# Altium PCB cpu2560-double.PcbDoc
Units mm, origin at the board's own origin, x right, y up, seen from the top; angles counter-clockwise.
Board outline 36 x 36 mm, 2 copper layers (Top Layer, Bottom Layer), stack 1.571 mm thick; 5 components, 96 nets, 204 pads, 0 vias.
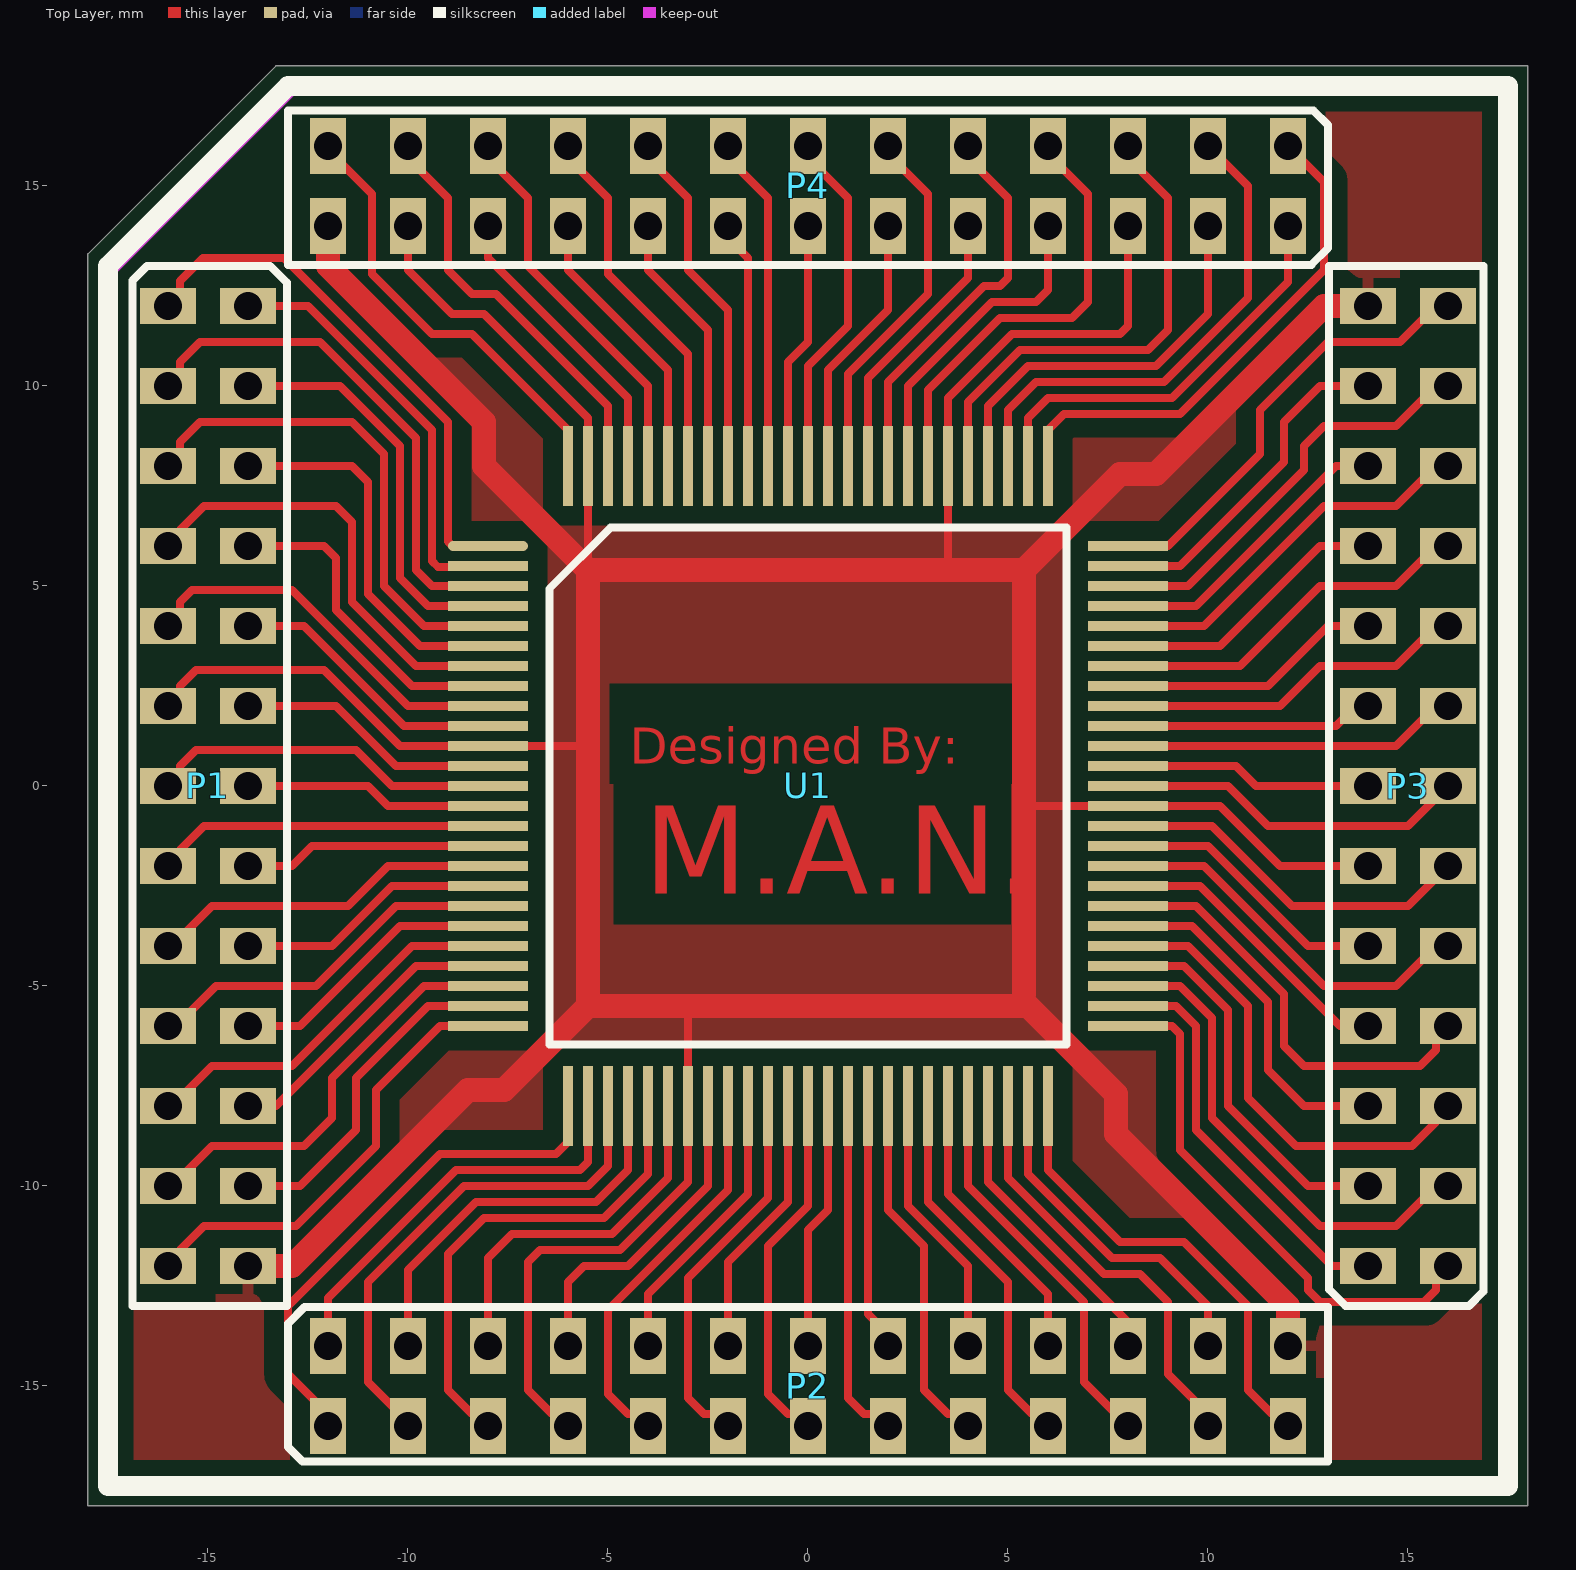
[diagram p0: Top Layer view]
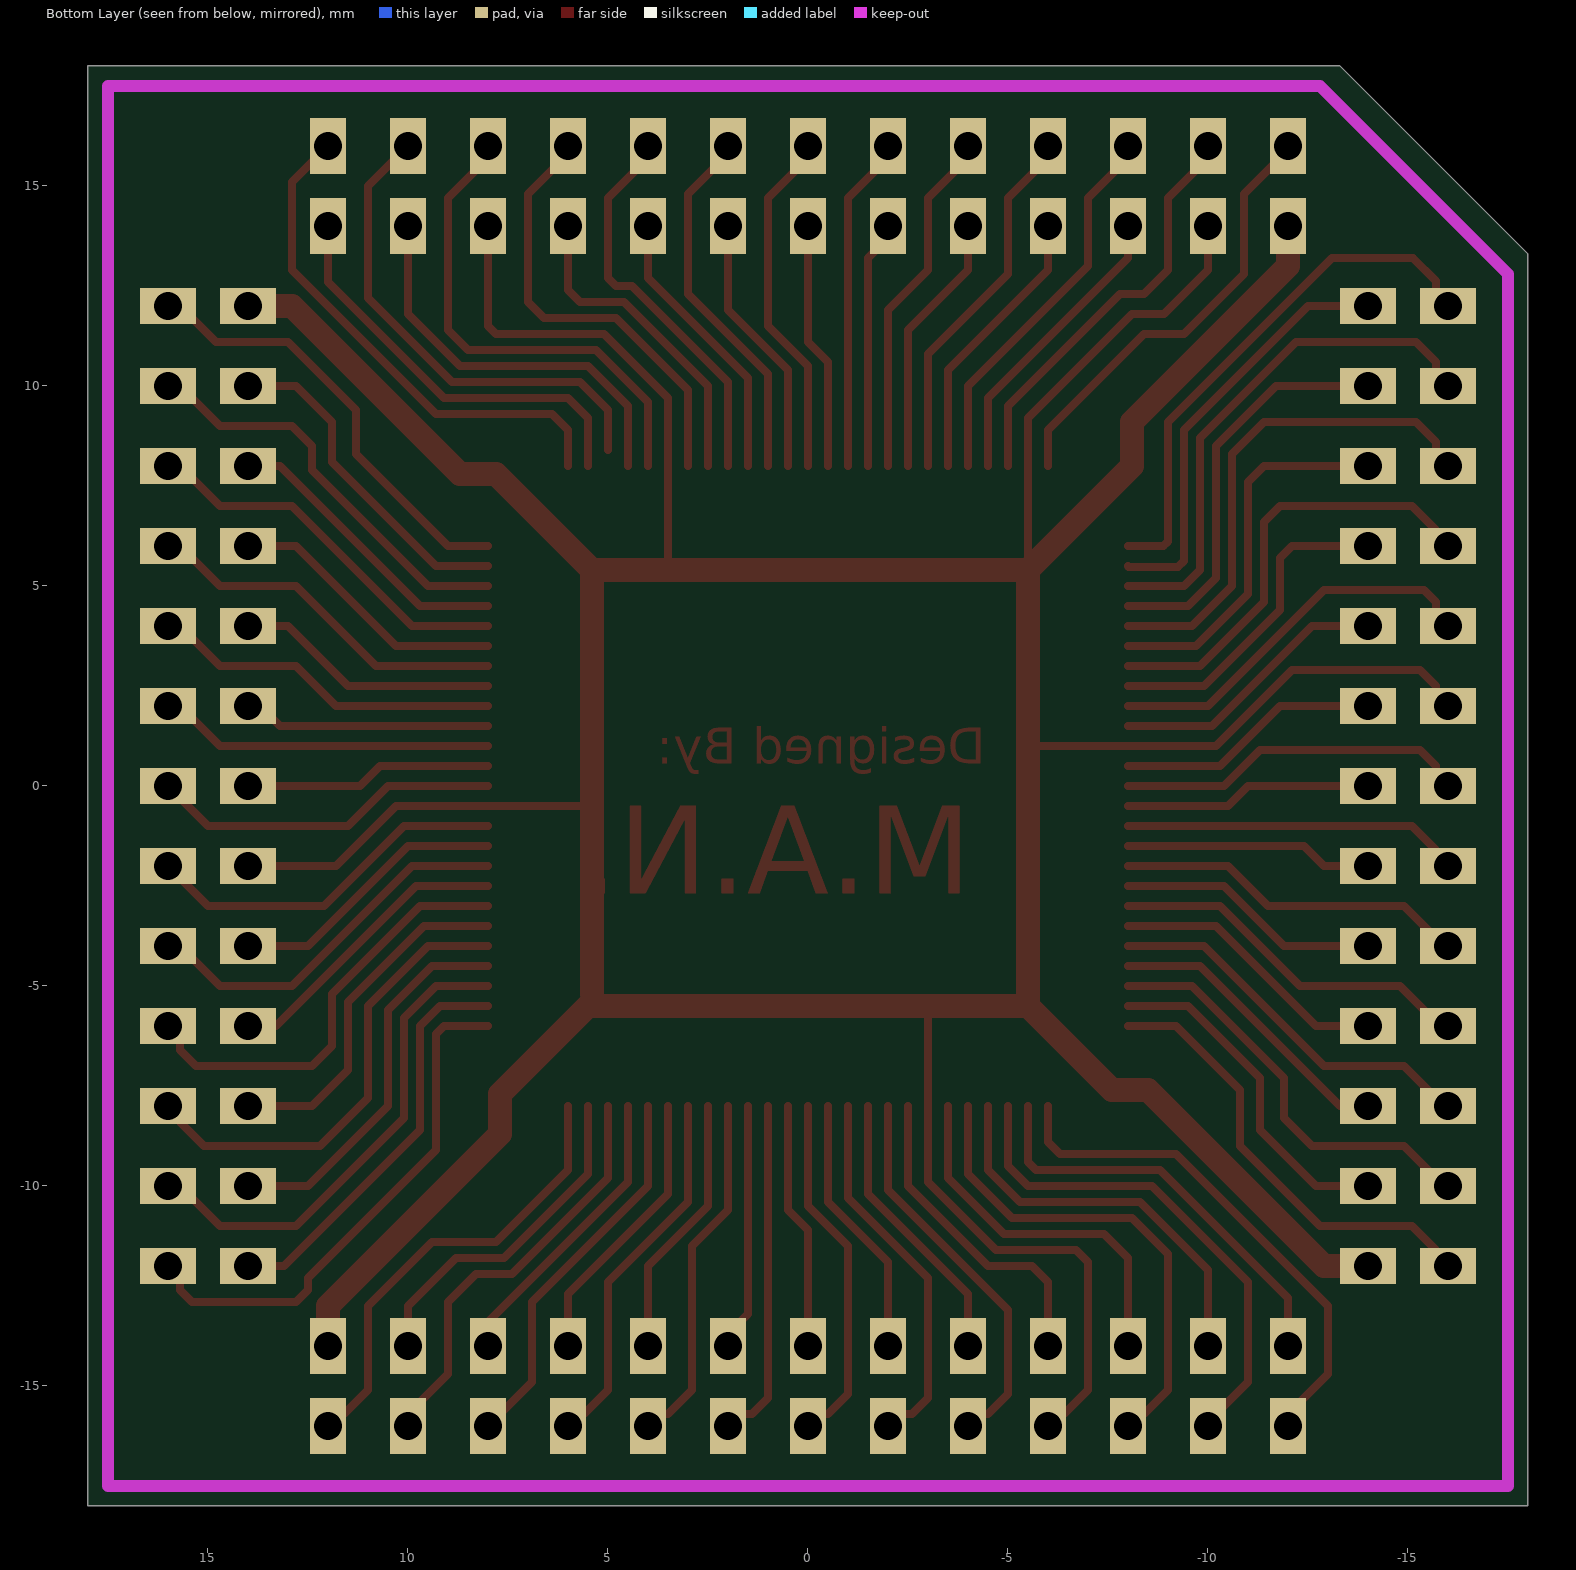
[diagram p1: Bottom Layer view, seen from below]

## Layer stack, top to bottom
Top Solder: solder mask 0.0102, Solder Resist, Dk 3.5
Top Layer: signal copper 0.0356
Dielectric2: dielectric 1.5, FR-4, Dk 4.8
Bottom Layer: signal copper 0.0356
Bottom Solder: solder mask 0.0102, Solder Resist, Dk 3.5

## Board outline
-18,-18 18,-18 18,18 -13.3,18 -18,13.3

## Design rules (kind name [scope] priority, off if disabled: settings)
Clearance Clearance_1 [InNamedPolygon('Top Layer-No Net')] p1: gap=0.5 ignorepadtopadclearanceinfootprint=FALSE except(0: Arc-Hole Track-Hole SMDPad-Hole THPad-Hole Via-Hole Fill-Hole Poly-Hole Region-Hole Text-Hole)
Clearance [All] p2: gap=0.2 ignorepadtopadclearanceinfootprint=FALSE
ComponentClearance [All] p1 off: gap=0.254 collisioncheckmode=3 verticalgap=0.254 showdistances=FALSE
FabricationTestPointUsage TestPointUsage [All] p1: valid=0 allowmultiple=FALSE
FabricationTestpoint Testpoint [All] p1: side=3 testpointundercomponent=TRUE minsize=1.016 maxsize=2.54 preferedsize=1.524 minholesize=0 maxholesize=1.016 preferedholesize=0.813 testpointgrid=0.025 allowsidetop=TRUE allowsidebottom=TRUE usegrid=TRUE gridtolerance=0
Height [All] p1 off: minheight=0 maxheight=25.4 prefheight=12.7
PolygonConnect [All] p1: connectstyle=Relief reliefconductorwidth=0.254 reliefentries=4 polygonreliefangle="90 Angle" airgapwidth=0.254
RoutingLayers [All] p1: top layer_v5=TRUE bottom layer_v5=FALSE
RoutingVias [All] p1: holewidth=0.6 width=1 viastyle="Through Hole" minholewidth=0.711 minwidth=1.27 maxholewidth=0.711 maxwidth=1.27
SolderMaskExpansion [All] p1: expansion=0.102 istentingtop=FALSE
Width [All] p1: maxlimit=1 minlimit=0.2 preferedwidth=0.2
25 further rules are at their usual default settings.

## Components (designator, comment, footprint, x,y, rotation, side; value= is the part's Value field where it differs from the comment)
P1 "MHDR2X13" HED-2mm-13X2 -16,12 r0 top
P2 "MHDR2X13" HED-2mm-13X2 -12,-16 r90 top
P3 "MHDR2X13" HED-2mm-13X2 16,-12 r180 top
P4 "MHDR2X13" HED-2mm-13X2 12,16 r270 top
U1 "ATMEGA 2560 - 100PIN - TQFP" Quad100 0,0 r0 top locked

## Footprints (in the part's own frame and the unit in brackets; to place one, negate y for a bottom-side part, rotate by r counter-clockwise, add the part's x,y. Pads: shape width x height; smd on the part's side, far side on the other; paste and mask are expansions set on the pad)
HED-2mm-13X2 [mm]
  rect 1.4x0.9 hole 0.7: 1(0,0) 2(2,0) 3(0,-2) 4(2,-2) 5(0,-4) 6(2,-4) 7(0,-6) 8(2,-6) 9(0,-8) 10(2,-8) 11(0,-10) 12(2,-10) 13(0,-12) 14(2,-12) 15(0,-14) 16(2,-14) 17(0,-16) 18(2,-16) 19(0,-18) 20(2,-18) 21(0,-20) 22(2,-20) 23(0,-22) 24(2,-22) 25(0,-24) 26(2,-24)
  silkscreen extent -0.89,-25 2.97,1
Quad100 [mm]
  oval 2x0.25 smd: 1(-8,5.999)
  rect 2x0.25 smd: 2(-8,5.499) 3(-8,4.999) 4(-8,4.499) 5(-8,3.999) 6(-8,3.499) 7(-8,2.999) 8(-8,2.499) 9(-8,1.999) 10(-8,1.499) 11(-8,0.999) 12(-8,0.499) 13(-8,-0.001) 14(-8,-0.501) 15(-8,-1.001) 16(-8,-1.501) 17(-8,-2.001) 18(-8,-2.501) 19(-8,-3.001) 20(-8,-3.501) 21(-8,-4.001) 22(-8,-4.501) 23(-8,-5.001) 24(-8,-5.501) 25(-8,-6.001) 51(8,-6.001) 52(8,-5.501) 53(8,-5.001) 54(8,-4.501) 55(8,-4.001) 56(8,-3.501) 57(8,-3.001) 58(8,-2.501) 59(8,-2.001) 60(8,-1.501) 61(8,-1.001) 62(8,-0.501) 63(8,-0.001) 64(8,0.499) 65(8,0.999) 66(8,1.499) 67(8,1.999) 68(8,2.499) 69(8,2.999) 70(8,3.499) 71(8,3.999) 72(8,4.499) 73(8,4.999) 74(8,5.499) 75(8,5.999)
  rect 0.25x2 smd: 26(-6,-8.001) 27(-5.5,-8.001) 28(-5,-8.001) 29(-4.5,-8.001) 30(-4,-8.001) 31(-3.5,-8.001) 32(-3,-8.001) 33(-2.5,-8.001) 34(-2,-8.001) 35(-1.5,-8.001) 36(-1,-8.001) 37(-0.5,-8.001) 38(0,-8.001) 39(0.5,-8.001) 40(1,-8.001) 41(1.5,-8.001) 42(2,-8.001) 43(2.5,-8.001) 44(3,-8.001) 45(3.5,-8.001) 46(4,-8.001) 47(4.5,-8.001) 48(5,-8.001) 49(5.5,-8.001) 50(6,-8.001) 76(6,7.999) 77(5.5,7.999) 78(5,7.999) 79(4.5,7.999) 80(4,7.999) 81(3.5,7.999) 82(3,7.999) 83(2.5,7.999) 84(2,7.999) 85(1.5,7.999) 86(1,7.999) 87(0.5,7.999) 88(0,7.999) 89(-0.5,7.999) 90(-1,7.999) 91(-1.5,7.999) 92(-2,7.999) 93(-2.5,7.999) 94(-3,7.999) 95(-3.5,7.999) 96(-4,7.999) 97(-4.5,7.999) 98(-5,7.999) 99(-5.5,7.999) 100(-6,7.999)
  silkscreen extent -6.46,-6.47 6.46,6.46

## Part data
P1 P2 P3 P4: "Header, 13-Pin, Dual row", LatestRevisionDate=17-Jul-2002, LatestRevisionNote="Re-released for DXP Platform.", Publisher="Altium Limited"
U1: library part "ATMEGA 2560"

## Nets (pads, with @x,y where several pads share a name; then routed paths per layer and width w, separated by ;. In a path a pad name is that pad's centre, name@x,y a point inside that pad or via, vN(x,y) a via of type N, cw(c..) or ccw(c..) an arc to the next point about the centre after c; other vN are vias at no path point)
7SEG-A0: P1.6 U1.6 | length 9.2
  Top Layer w0.2: P1.6@-13.7,8 -11.4,8 -11,7.6 -11,4.8 -9.699,3.499 U1.6
7SEG-A1: P1.5 U1.5 | length 12.6
  Top Layer w0.2: P1.5@-15.7,8 -15.7,8.6 -15.2,9.1 -11.4,9.1 -10.6,8.3 -10.6,5 -9.599,3.999 U1.5
7SEG-A2: P1.4 U1.4 | length 9.9
  Top Layer w0.2: P1.4@-13.7,10 -11.7,10 -10.2,8.5 -10.2,5.2 -9.499,4.499 U1.4
7SEG-A3: P1.3 U1.3 | length 13
  Top Layer w0.2: P1.3@-15.7,10 -15.7,10.6 -15.2,11.1 -12.2,11.1 -9.8,8.7 -9.8,5.4 -9.399,4.999 U1.3
7SEG-CLK: P4.18 U1.93 | length 6.3
  Top Layer w0.2: P4.18@-4,13.7 -4,12.9 -2.5,11.4 U1.93
7SEG-DOT: P1.2 U1.2 | length 10.3
  Top Layer w0.2: P1.2@-13.7,12 -12.5,12 -9.4,8.9 -9.4,5.626 -9.253,5.479 -8.02,5.479 U1.2
7SEG-RST: P4.17 U1.92 | length 8.5
  Top Layer w0.2: P4.17@-4,15.7 -3,14.7 -3,12.9 -2,11.9 U1.92
ADC_LEVEL: P4.9 U1.84 | length 9.6
  Top Layer w0.2: U1.84 2,10.1 4.4,12.5 4.8,12.5 5,12.7 5,14.7 P4.9@4,15.7
ADC_MIC: P4.8 U1.83 | length 7.8
  Top Layer w0.2: U1.83 2.5,10 4.6,12.1 5.7,12.1 6,12.4 P4.8@6,13.7
CLCD-EN: P3.20 U1.70 | length 6.7
  Top Layer w0.2: U1.70 10.299,3.499 12.8,6 P3.20@13.7,6
DATA0: P4.3 U1.78 | length 12.2
  Top Layer w0.2: U1.78@5,8.4 5,9.4 5.7,10.1 8.9,10.1 11,12.2 11,15 10.3,15.7 P4.3@10,15.7
DATA1: P4.2 U1.77 | length 10.2
  Top Layer w0.2: U1.77 5.5,9.2 6,9.7 9.1,9.7 12,12.6 P4.2@12,13.7
DATA2: P4.1 U1.76 | length 12.8
  Top Layer w0.2: U1.76 6,8.9 6.4,9.3 9.3,9.3 12.9,12.9 12.9,15.1 12.3,15.7 P4.1@12,15.7
DATA3: P3.25 U1.75 | length 10.8
  Top Layer w0.2: U1.75 8.999,5.999 11.3,8.3 11.3,9.4 13,11.1 14.8,11.1 P3.25@15.7,12
DATA4: P3.24 U1.74 | length 8.2
  Top Layer w0.2: U1.74 9.299,5.499 11.9,8.1 11.9,9.1 12.8,10 P3.24@13.7,10
DATA5: P3.23 U1.73 | length 10.1
  Top Layer w0.2: U1.73 9.499,4.999 12.4,7.9 12.4,8.5 12.9,9 14.7,9 P3.23@15.7,10
DATA6: P3.22 U1.72 | length 7.2
  Top Layer w0.2: U1.72 9.699,4.499 13.2,8 P3.22@13.7,8
DATA7: P3.21 U1.71 | length 9.4
  Top Layer w0.2: U1.71 9.899,3.999 12.9,7 14.7,7 P3.21@15.7,8
DATA8: P2.10 U1.35 | length 6.7
  Top Layer w0.2: P2.10@-4,-13.7 -4,-12.7 -1.5,-10.2 U1.35
DATA9: P2.11 U1.36 | length 9.3
  Top Layer w0.2: P2.11@-2,-15.7 -2.6,-15.7 -3,-15.3 -3,-12.3 -1,-10.3 U1.36
DATA10: P2.12 U1.37 | length 6.3
  Top Layer w0.2: P2.12@-2,-13.7 -2,-11.9 -0.5,-10.4 U1.37
DATA11: P2.13 U1.38 | length 8.8
  Top Layer w0.2: P2.13@0,-15.7 -0.5,-15.7 -1,-15.2 -1,-11.5 0,-10.5 U1.38
DATA12: P2.14 U1.39 | length 5.9
  Top Layer w0.2: P2.14@0,-13.7 0,-11.1 0.5,-10.6 U1.39
DATA13: P2.15 U1.40 | length 8.5
  Top Layer w0.2: U1.40 1,-15.3 1.4,-15.7 P2.15@2,-15.7
DATA14: P2.16 U1.41 | length 5.9
  Top Layer w0.2: U1.41 1.5,-13.2 P2.16@2,-13.7
DATA15: P2.17 U1.42 | length 8.8
  Top Layer w0.2: U1.42 2,-10.6 2.9,-11.5 2.9,-15.1 3.5,-15.7 P2.17@4,-15.7
DCM-EN-PWM: P2.1 U1.26 | length 12.7
  Top Layer w0.2: P2.1@-12,-15.7 -13,-14.7 -13,-13 -9.2,-9.2 -6.3,-9.2 -6,-8.9 U1.26
DCM-IN1: P2.3 U1.28 | length 12.5
  Top Layer w0.2: P2.3@-10,-15.7 -10.2,-15.7 -11,-14.9 -11,-12.4 -8.6,-10 -5.5,-10 -5,-9.5 U1.28
DCM-IN2: P2.4 U1.29 | length 9.7
  Top Layer w0.2: P2.4@-10,-13.7 -10,-12.1 -8.3,-10.4 -5.3,-10.4 -4.5,-9.6 U1.29
DM-CLK: P2.22 U1.47 | length 7.1
  Top Layer w0.2: U1.47 4.5,-9.9 8,-13.4 P2.22@8,-13.7
DM-RST: P2.23 U1.48 | length 10.3
  Top Layer w0.2: U1.48 5,-9.8 7.4,-12.2 8.3,-12.2 9,-12.9 9,-14.7 P2.23@10,-15.7
ETH-CS: P4.14 U1.89 | length 5.9
  Top Layer w0.2: U1.89 -0.5,10.6 0,11.1 P4.14@0,13.7
ETH-RST: P1.9 U1.9 | length 9.6
  Top Layer w0.2: P1.9@-15.7,4 -15.7,4.6 -15.4,4.9 -12.9,4.9 -9.999,1.999 U1.9
GLCD-CSA: P4.4 U1.79 | length 9.9
  Top Layer w0.2: U1.79 4.5,9.5 5.5,10.5 8.7,10.5 10,11.8 P4.4@10,13.7
GLCD-CSB: P1.18 U1.18 | length 6.3
  Top Layer w0.2: P1.18@-13.7,-4 -11.9,-4 -10.401,-2.501 U1.18
GLCD-EN: P3.17 U1.67 | length 8.5
  Top Layer w0.2: U1.67 11.799,1.999 12.8,3 14.7,3 P3.17@15.7,4
GLCD-RST: P3.16 U1.66 | length 5.9
  Top Layer w0.2: U1.66 13.199,1.499 P3.16@13.7,2
GND: P1.11 P1.26 P2.7 P2.26 P3.12 P3.26 P4.6 P4.24 P4.26 U1.11 U1.32 U1.62 U1.81 U1.99 | length 142.3
  Top Layer w0.2: P1.11@-15.7,2 -15.7,2.5 -15.3,2.9 -12.1,2.9 -10.199,0.999 U1.11 -5.801,0.999 -5.8,1 ; P4.24@-10,13.7 -10,12.9 -8.9,11.8 -8.1,11.8 -5.5,9.2 U1.99 -5.5,5.7 ; P2.7@-6,-15.7 -6.4,-15.7 -7,-15.1 -7,-11.9 -6.7,-11.6 -4.7,-11.6 -3,-9.9 U1.32 -3,-5.8 ; 3.5,5.7 U1.81 3.5,9.7 5.1,11.3 7.8,11.3 8,11.5 P4.6@8,13.7 ; 5.7,-0.5 5.701,-0.501 U1.62 10.301,-0.501 11.8,-2 P3.12@13.7,-2
  Top Layer w0.6: P1.26@-13.7,-12 -12.9,-12 -8.5,-7.6 -7.6,-7.6 -5.5,-5.5 ; P4.26@-12,13.7 -12,13 -8.1,9.1 -8.1,8 -5.5,5.4 ; 5.4,-5.2 5.4,5.4 ; P2.26@12,-13.7 12,-13 7.7,-8.7 7.7,-7.7 5.5,-5.5 -5.5,-5.5 ; P3.26@13.7,12 12.9,12 8.7,7.8 7.8,7.8 5.4,5.4 ; -5.5,-5.5 -5.5,5.4 ; -5.5,5.4 5.4,5.4
LCD-DI+SWCLK: P3.19 U1.69 | length 8.9
  Top Layer w0.2: U1.69 10.799,2.999 12.8,5 14.7,5 P3.19@15.7,6
LCD-RW+SWDIO: P3.18 U1.68 | length 6.3
  Top Layer w0.2: U1.68 11.499,2.499 13,4 P3.18@13.7,4
LED-BLUE: P1.23 U1.23 | length 10.5
  Top Layer w0.2: P1.23@-15.7,-10 -15.7,-9.8 -14.9,-9 -12.6,-9 -11.9,-8.3 -11.9,-7.3 -9.601,-5.001 U1.23
LED-GREEN: P1.24 U1.24 | length 8.3
  Top Layer w0.2: P1.24@-13.7,-10 -12.7,-10 -11.3,-8.6 -11.3,-7.3 -9.501,-5.501 U1.24
LED-RED: P1.25 U1.25 | length 11.2
  Top Layer w0.2: P1.25@-15.7,-12 -15.7,-11.6 -15.1,-11 -12.8,-11 -10.8,-9 -10.8,-7.6 -9.201,-6.001 U1.25
LED-YELLOW: P2.2 U1.27 | length 10.2
  Top Layer w0.2: P2.2@-12,-13.7 -12,-12.8 -8.8,-9.6 -5.7,-9.6 -5.5,-9.4 U1.27
LM35-OUT: P4.7 U1.82 | length 10.9
  Top Layer w0.2: U1.82 3,9.9 4.8,11.7 6.6,11.7 7,12.1 7,14.8 6.1,15.7 P4.7@6,15.7
MISO: P1.22 U1.22 | length 7.1
  Top Layer w0.2: P1.22@-13.7,-8 -13.3,-8 -9.801,-4.501 U1.22
MMC-NSS: P1.19 U1.19 | length 9
  Top Layer w0.2: P1.19@-15.7,-6 -15.7,-5.9 -14.8,-5 -12.3,-5 -10.301,-3.001 U1.19
MOSI: P1.21 U1.21 | length 9.5
  Top Layer w0.2: P1.21@-15.7,-8 -15.7,-7.8 -14.9,-7 -12.9,-7 -9.901,-4.001 U1.21
PB1+ETH_INT: P1.7 U1.7 | length 11.2
  Top Layer w0.2: P1.7@-15.7,6 -15.7,6.4 -15.1,7 -11.8,7 -11.4,6.6 -11.4,4.6 -9.799,2.999 U1.7
PB2: P1.8 U1.8 | length 7.9
  Top Layer w0.2: P1.8@-13.7,6 -12.1,6 -11.8,5.7 -11.8,4.4 -9.899,2.499 U1.8
PB3: P1.14 U1.14 | length 5.9
  Top Layer w0.2: P1.14@-13.7,0 -11,0 -10.499,-0.501 U1.14
PB4: P1.15 U1.15 | length 8.3
  Top Layer w0.2: P1.15@-15.7,-2 -15.7,-1.6 -15.101,-1.001 U1.15
PIN1: P1.1 U1.1 | length 13.3
  Top Layer w0.2: P1.1@-15.7,12 -15.7,12.621 -15.121,13.2 -13.1,13.2 -8.999,9.099 -8.999,6.114 -8.884,5.999 U1.1
PIN10: P1.10 U1.10 | length 6.7
  Top Layer w0.2: P1.10@-13.7,4 -12.6,4 -10.099,1.499 U1.10
PIN12: P1.12 U1.12 | length 6.3
  Top Layer w0.2: P1.12@-13.7,2 -11.8,2 -10.299,0.499 U1.12
PIN13: P1.13 U1.13 | length 8.7
  Top Layer w0.2: P1.13@-15.7,0 -15.7,0.5 -15.3,0.9 -11.3,0.9 -10.399,-0.001 U1.13
PIN16: P1.16 U1.16 | length 5.9
  Top Layer w0.2: P1.16@-13.7,-2 -12.9,-2 -12.401,-1.501 U1.16
PIN17: P1.17 U1.17 | length 8.6
  Top Layer w0.2: P1.17@-15.7,-4 -15.7,-3.8 -14.9,-3 -11.5,-3 -10.501,-2.001 U1.17
PIN20: P1.20 U1.20 | length 6.7
  Top Layer w0.2: P1.20@-13.7,-6 -12.7,-6 -10.201,-3.501 U1.20
PIN30: P2.5 U1.30 | length 12.2
  Top Layer w0.2: P2.5@-8,-15.7 -8.4,-15.7 -9,-15.1 -9,-11.7 -8.1,-10.8 -5.1,-10.8 -4,-9.7 U1.30
pin31: P2.6 U1.31 | length 9
  Top Layer w0.2: P2.6@-8,-13.7 -8,-11.8 -7.4,-11.2 -4.9,-11.2 -3.5,-9.8 U1.31
PIN33: P2.8 U1.33 | length 7.8
  Top Layer w0.2: P2.8@-6,-13.7 -6,-12.4 -5.6,-12 -4.5,-12 -2.5,-10 U1.33
PIN34: P2.9 U1.34 | length 9.6
  Top Layer w0.2: P2.9@-4,-15.7 -4.5,-15.7 -5,-15.2 -5,-13.1 -2,-10.1 U1.34
PIN43: P2.18 U1.43 | length 6.3
  Top Layer w0.2: U1.43 2.5,-10.5 4,-12 P2.18@4,-13.7
PIN44: P2.19 U1.44 | length 9.2
  Top Layer w0.2: U1.44 3,-10.4 5,-12.4 5,-15.1 5.6,-15.7 P2.19@6,-15.7
PIN45: P2.20 U1.45 | length 6.7
  Top Layer w0.2: U1.45 3.5,-10.2 6,-12.7 P2.20@6,-13.7
PIN46: P2.21 U1.46 | length 9.5
  Top Layer w0.2: U1.46 4,-10 6.9,-12.9 6.9,-14.9 7.7,-15.7 P2.21@8,-15.7
PIN49: P2.24 U1.49 | length 8.3
  Top Layer w0.2: U1.49 5.5,-9.7 7.6,-11.8 8.8,-11.8 10,-13 P2.24@10,-13.7
PIN50: P2.25 U1.50 | length 11.4
  Top Layer w0.2: U1.50 6,-9.6 7.8,-11.4 9.4,-11.4 11,-13 11,-15.1 11.6,-15.7 P2.25@12,-15.7
PIN51: P3.1 U1.51 | length 13.2
  Top Layer w0.2: U1.51 9.101,-6.001 9.3,-6.2 9.3,-9.1 12.5,-12.3 12.5,-12.6 12.8,-12.9 15.4,-12.9 15.7,-12.6 P3.1@15.7,-12
PIN52: P3.2 U1.52 | length 9.9
  Top Layer w0.2: U1.52 9.201,-5.501 9.7,-6 9.7,-8.6 13.1,-12 P3.2@13.7,-12
PIN53: P3.3 U1.53 | length 12.1
  Top Layer w0.2: U1.53 9.301,-5.001 10.1,-5.8 10.1,-8.3 12.8,-11 14.7,-11 P3.3@15.7,-10
PIN54: P3.4 U1.54 | length 9.4
  Top Layer w0.2: U1.54 9.401,-4.501 10.5,-5.6 10.5,-8 12.5,-10 P3.4@13.7,-10
PIN55: P3.5 U1.55 | length 11.8
  Top Layer w0.2: U1.55 9.501,-4.001 11,-5.5 11,-7.8 12.2,-9 15.1,-9 15.7,-8.4 P3.5@15.7,-8
PIN56: P3.6 U1.56 | length 8.6
  Top Layer w0.2: U1.56 9.601,-3.501 11.5,-5.4 11.5,-7.1 12.4,-8 P3.6@13.7,-8
PIN57: P3.7 U1.57 | length 10.9
  Top Layer w0.2: U1.57 9.701,-3.001 11.9,-5.2 11.9,-6.5 12.4,-7 15.3,-7 15.7,-6.6 P3.7@15.7,-6
PIN58: P3.8 U1.58 | length 7.1
  Top Layer w0.2: U1.58 9.801,-2.501 13.3,-6 P3.8@13.7,-6
PIN59: P3.9 U1.59 | length 9.4
  Top Layer w0.2: U1.59 9.901,-2.001 12.9,-5 14.7,-5 P3.9@15.7,-4
PIN60: P3.10 U1.60 | length 6.7
  Top Layer w0.2: U1.60 10.001,-1.501 12.5,-4 P3.10@13.7,-4
pin61: P3.11 U1.61 | length 9.1
  Top Layer w0.2: U1.61 10.101,-1.001 12.1,-3 15,-3 15.7,-2.3 P3.11@15.7,-2
PIN63: P3.13 U1.63 | length 8.7
  Top Layer w0.2: U1.63 10.501,-0.001 11.5,-1 15,-1 15.7,-0.3 P3.13@15.7,0
PIN64: P3.14 U1.64 | length 5.9
  Top Layer w0.2: U1.64 10.701,0.499 11.2,0 P3.14@13.7,0
PIN65: P3.15 U1.65 | length 8.1
  Top Layer w0.2: U1.65 14.699,0.999 P3.15@15.7,2
pin80: P4.5 U1.80 | length 12.1
  Top Layer w0.2: U1.80 4,9.6 5.3,10.9 8.5,10.9 9,11.4 9,14.7 P4.5@8,15.7
PIN85: P4.10 U1.85 | length 6.7
  Top Layer w0.2: U1.85 1.5,10.2 4,12.7 P4.10@4,13.7
PIN86: P4.11 U1.86 | length 9
  Top Layer w0.2: U1.86 1,10.3 3,12.3 3,14.8 2.1,15.7 P4.11@2,15.7
PIN87: P4.12 U1.87 | length 6.3
  Top Layer w0.2: U1.87 0.5,10.4 2,11.9 P4.12@2,13.7
PIN88: P4.13 U1.88 | length 8.5
  Top Layer w0.2: U1.88 0,10.5 1,11.5 1,14.7 P4.13@0,15.7
PIN90: P4.15 U1.90 | length 8.1
  Top Layer w0.2: P4.15@-2,15.7 -1,14.7 U1.90
PIN91: P4.16 U1.91 | length 5.9
  Top Layer w0.2: P4.16@-2,13.7 -1.5,13.2 U1.91
PIN94: P4.19 U1.94 | length 8.9
  Top Layer w0.2: P4.19@-6,15.7 -5,14.7 -5,12.8 -3,10.8 U1.94
PIN95: P4.20 U1.95 | length 6.7
  Top Layer w0.2: P4.20@-6,13.7 -6,12.9 -3.5,10.4 U1.95
PIN96: P4.21 U1.96 | length 9.4
  Top Layer w0.2: P4.21@-8,15.7 -7,14.7 -7,13 -4,10 U1.96
PIN97: P4.22 U1.97 | length 7.2
  Top Layer w0.2: P4.22@-8,13.7 -8,13.2 -4.5,9.7 U1.97
PIN98: P4.23 U1.98 | length 10.1
  Top Layer w0.2: P4.23@-10,15.7 -9,14.7 -9,12.9 -8.4,12.3 -7.8,12.3 -5,9.5 U1.98
PIN100: P4.25 U1.100 | length 10.9
  Top Layer w0.2: P4.25@-12,15.7 -11.8,15.7 -10.9,14.8 -10.9,12.8 -9.4,11.3 -8.4,11.3 -6,8.9 U1.100

## Polygon pours and split planes (outlines as drawn)
GND on Top Layer "Top Layer-No Net" (solid, remove dead copper, pour order 1000): -17,-17 17,-17 17,17 -17,17 -17,-17

## Keep-outs
Keep-Out Layer:
  lines w0.3: -17.5,-17.5 -17.5,12.8 -12.8,17.5 17.5,17.5 17.5,-17.5 -17.5,-17.5

## Other copper
Top Layer:
  text "Designed By:" at -4.45,0.55 h0.9
  text "M.A.N." at -4.1,-2.7 h2.2

## Silkscreen, mask and mechanical layers (free items; w line width, h text height)
Top Overlay:
  lines w0.5: -17.5,-17.5 -17.5,13 -13,17.5 17.5,17.5 17.5,-17.5 -17.5,-17.5